# Altium PCB Mixer_Placed.PCBDOC (part 1 of 2)
Units mil, origin at the board's own origin, x right, y up, seen from the top; angles counter-clockwise.
Board outline 16350 x 11350 mil, 2 copper layers (TopLayer, BottomLayer); 554 components, 386 nets, 1551 pads, 0 vias.
Unrouted connection lines stored in the file: 1047.
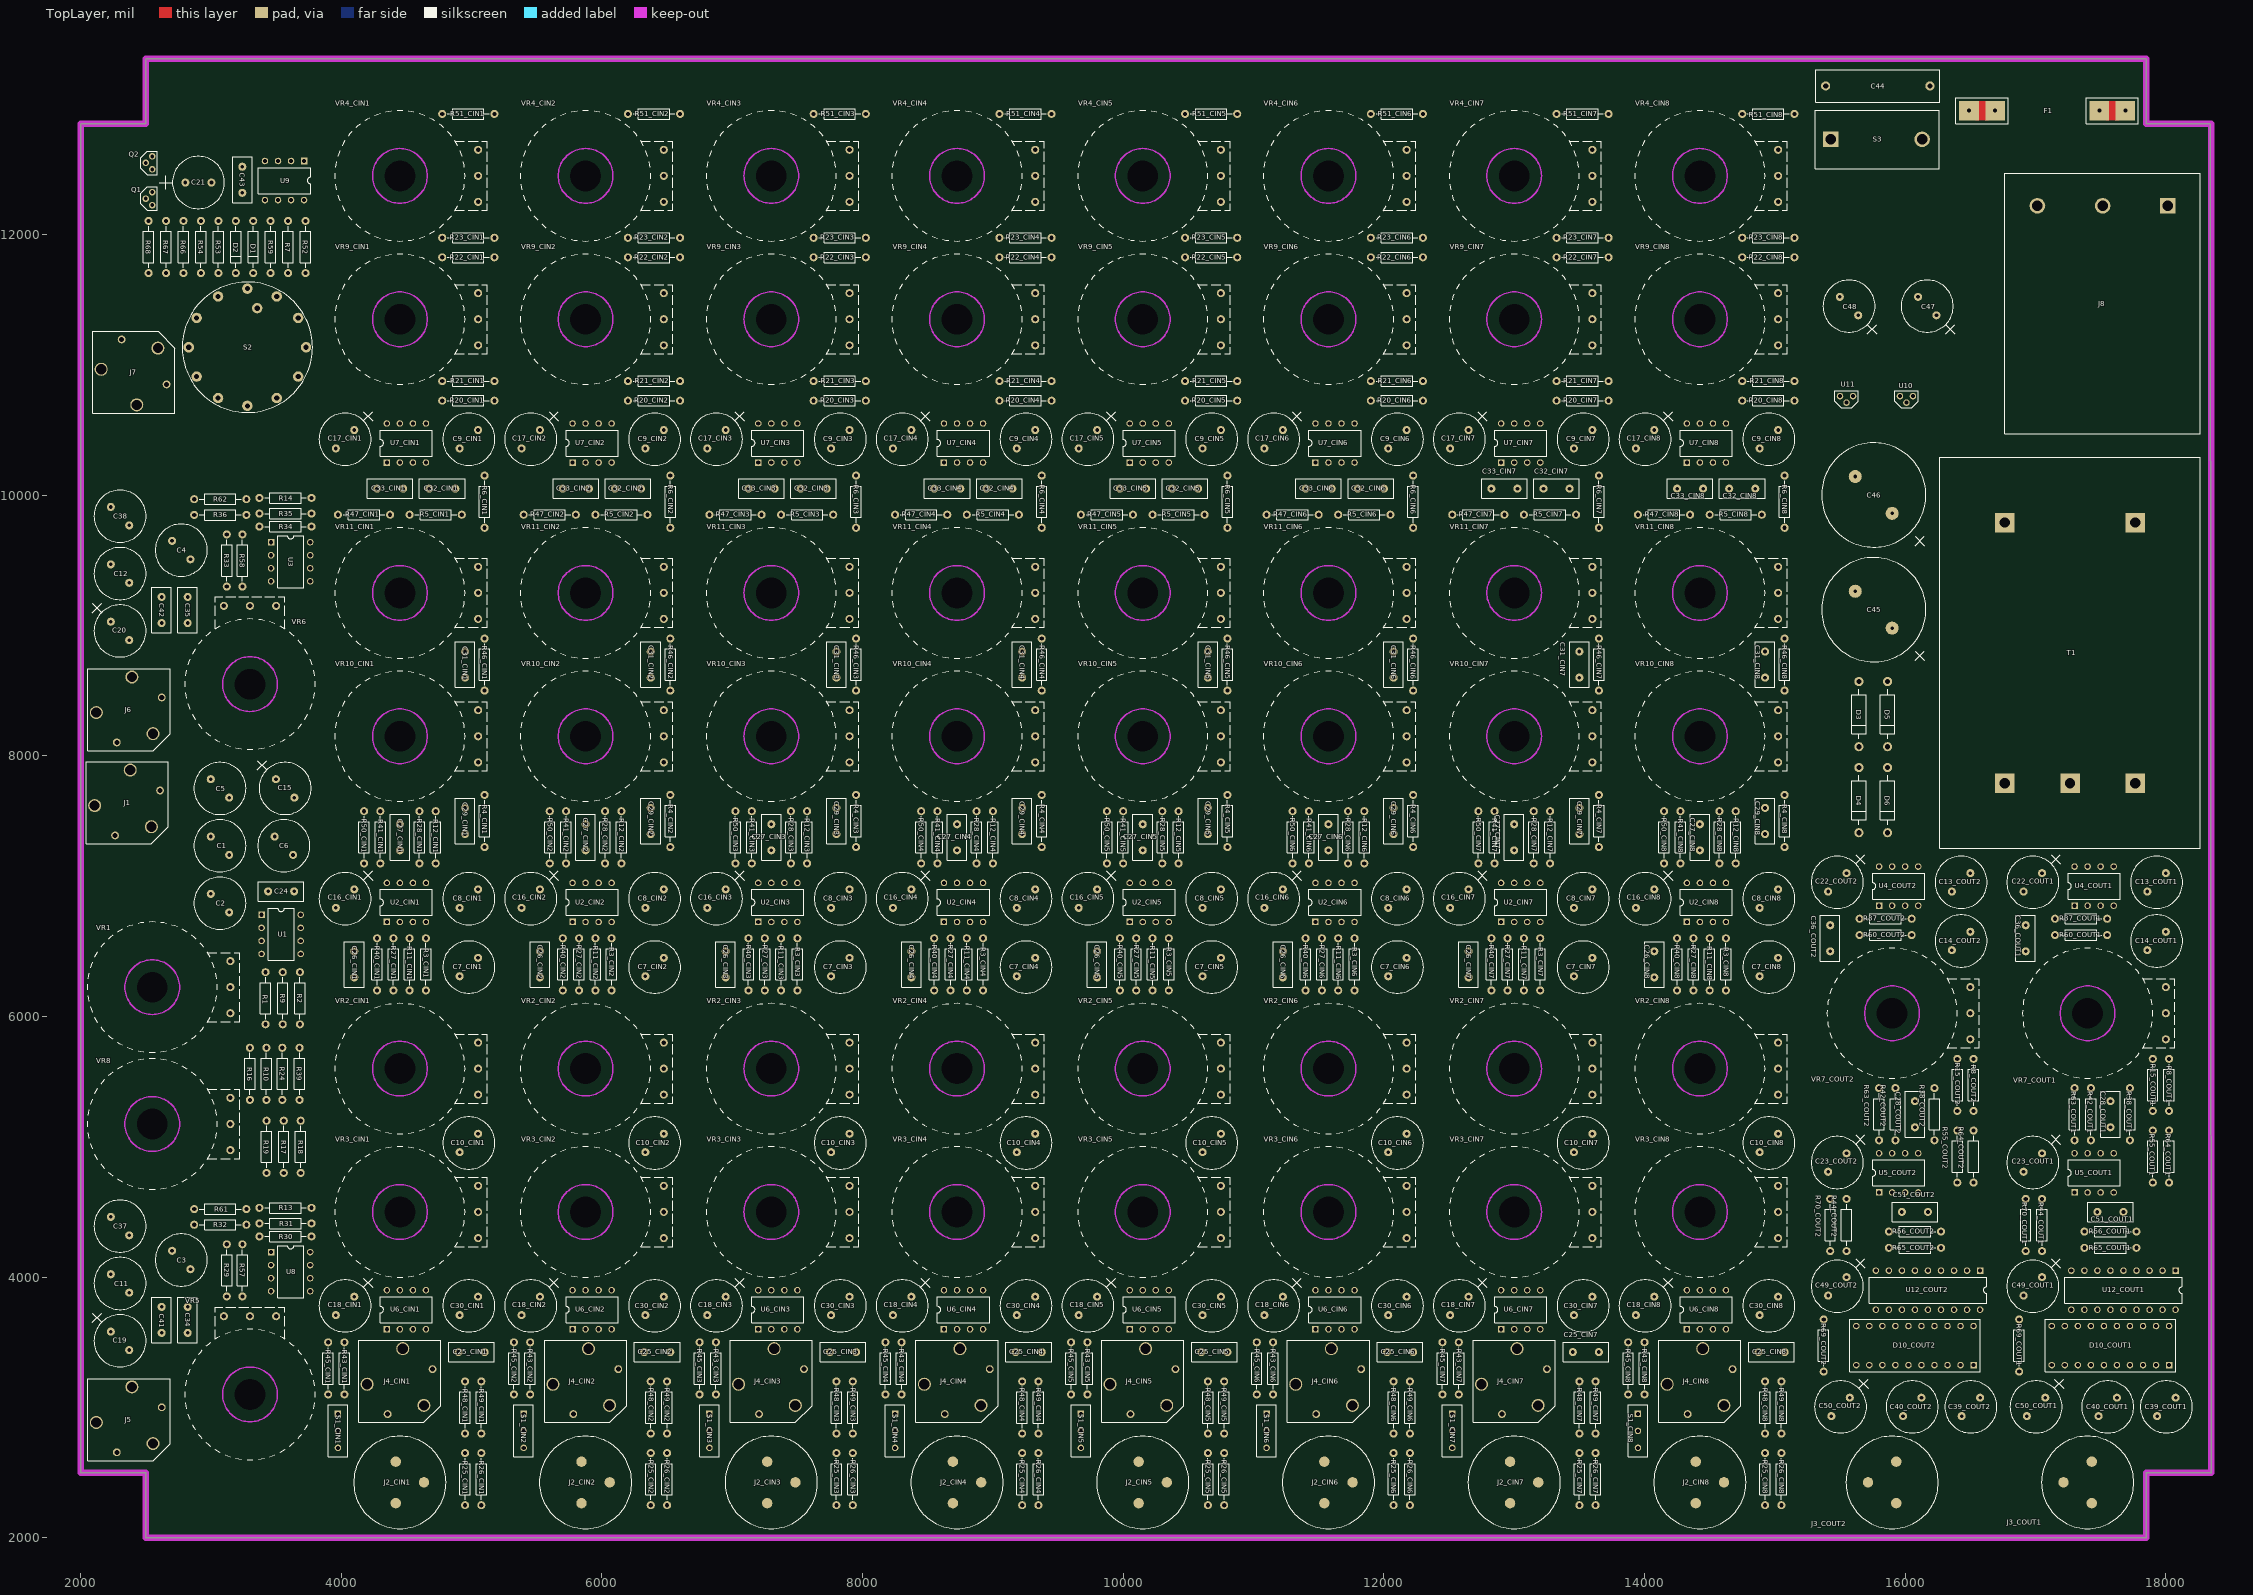
[diagram p0: TopLayer view]
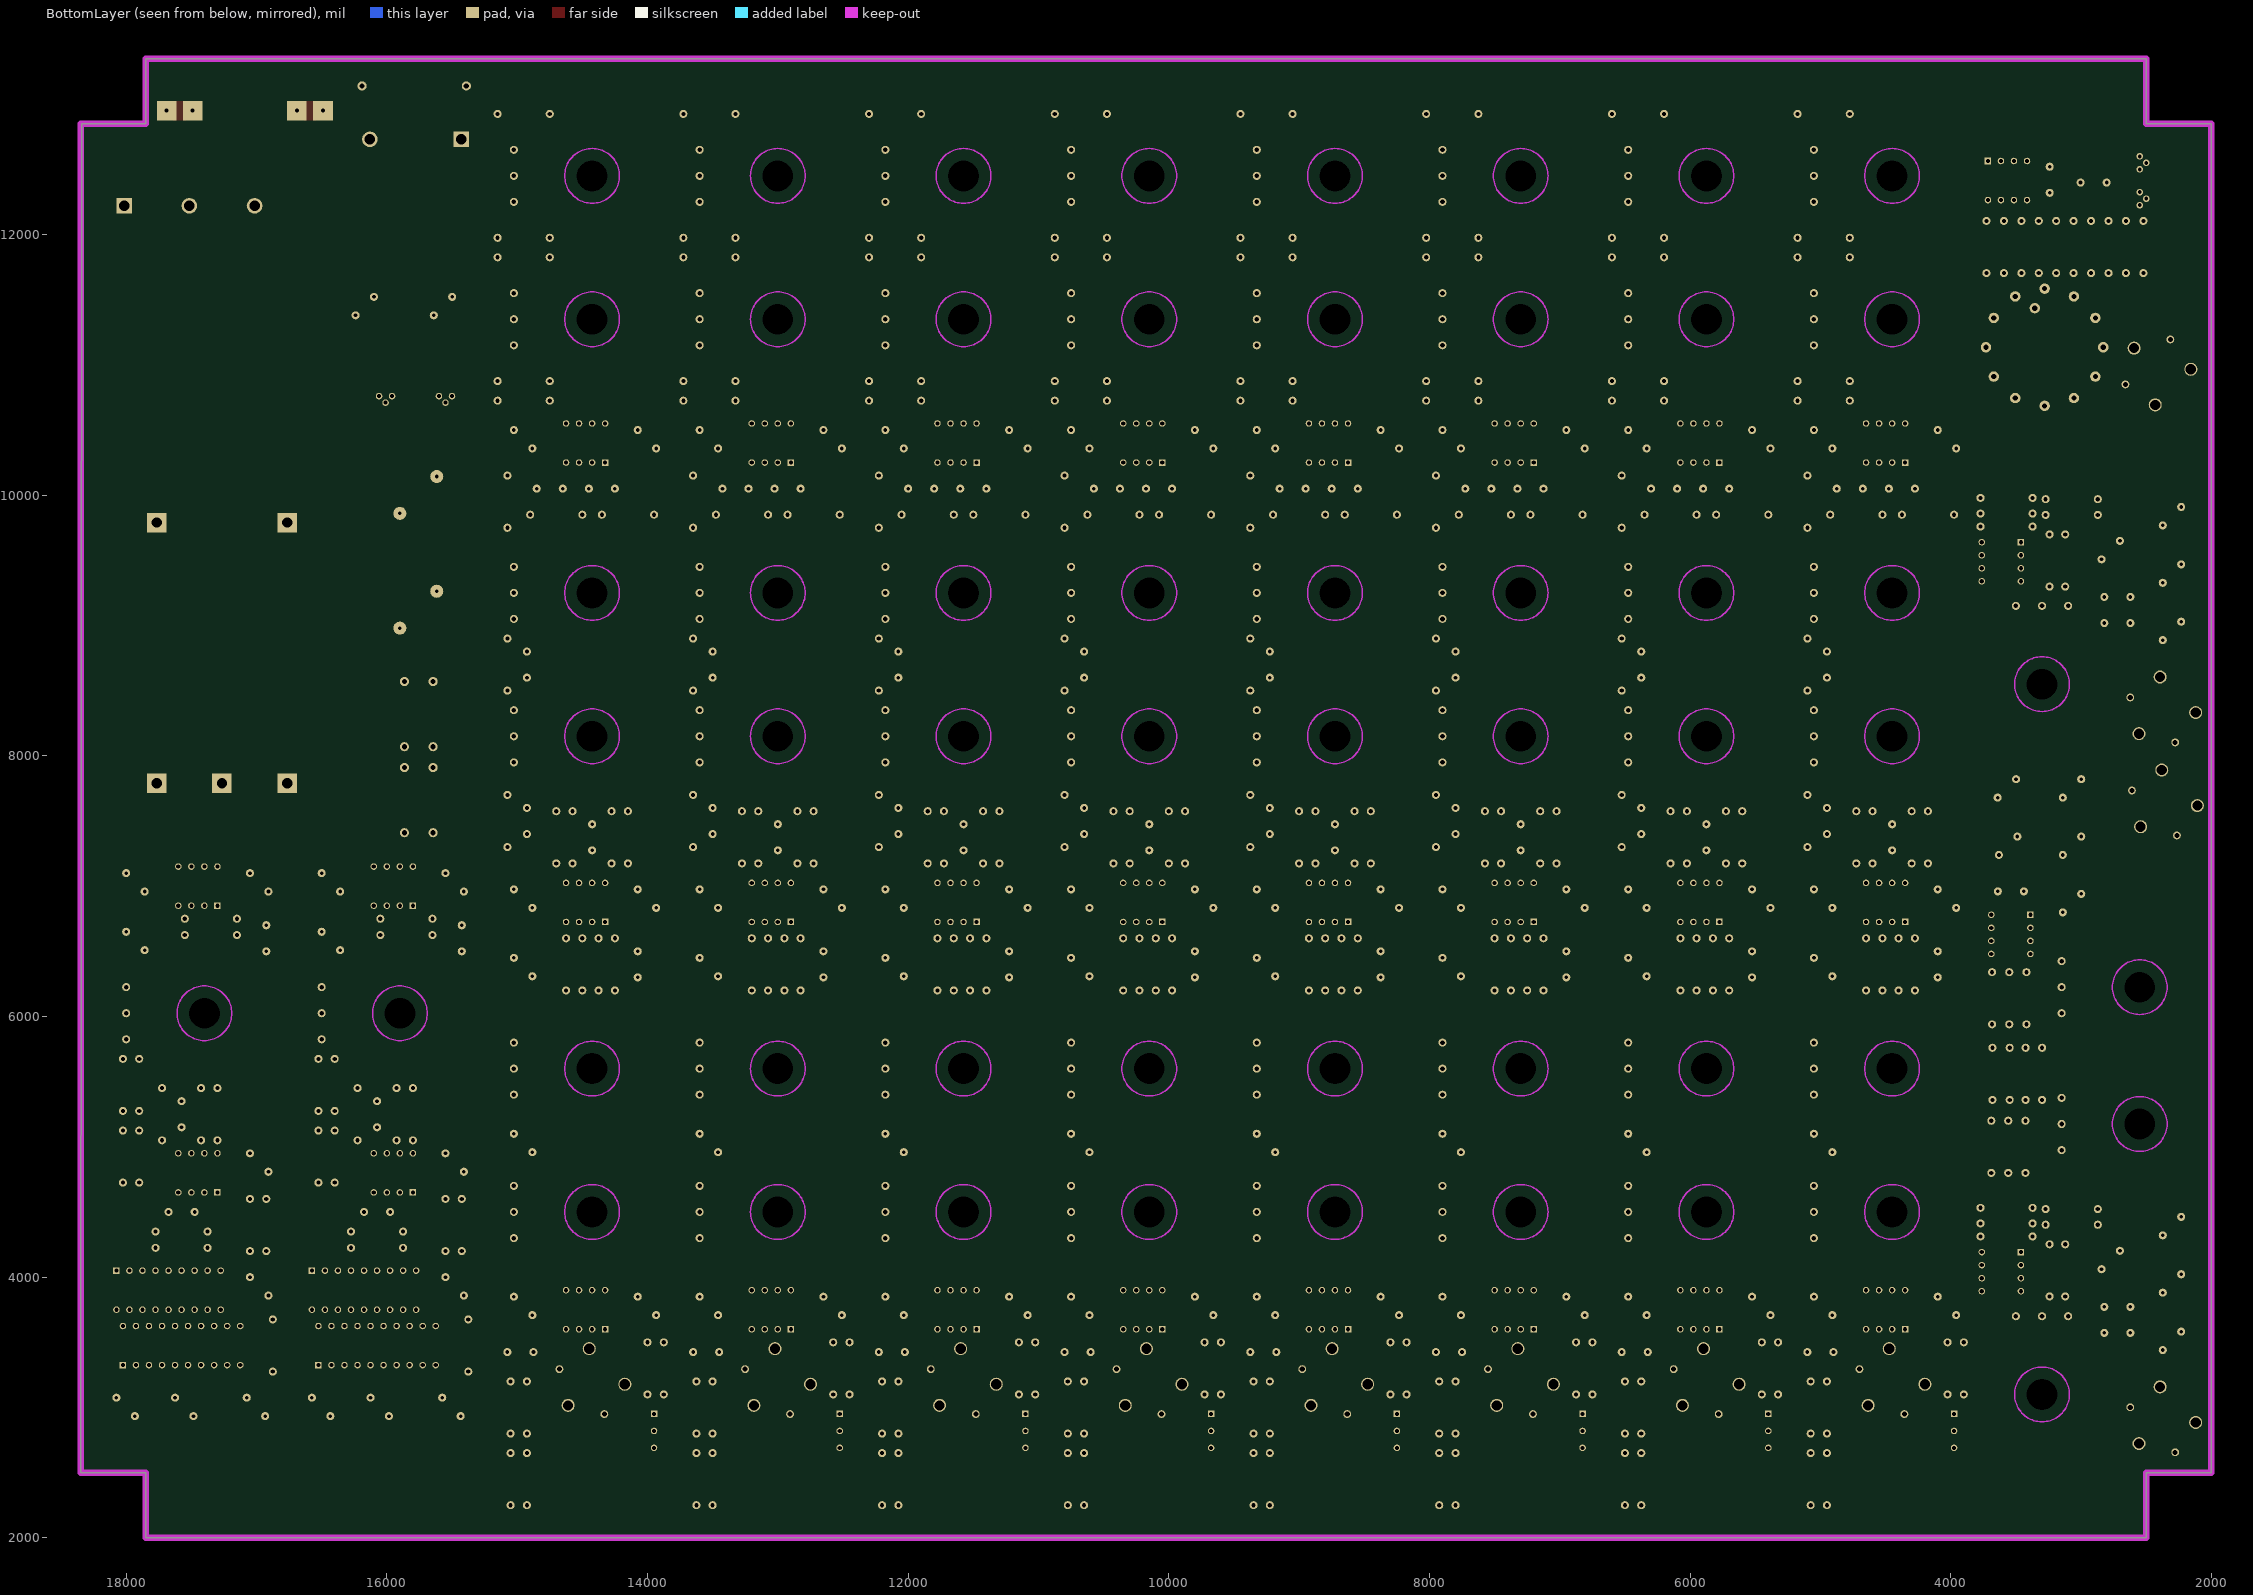
[diagram p1: BottomLayer view, seen from below]

## Layer stack, top to bottom
TopLayer: signal copper 1.4
Dielectric: core 12.6, FR-4, Dk 4.8
BottomLayer: signal copper 1.4

## Board outline
17850,2500 18350,2500 18340,12850 17850,12850 17850,13350 2500,13350 2500,12850 2000,12850 2000,2500 2500,2500 2500,2000 17850,2000 17850,2500

## Design rules (kind name [scope] priority, off if disabled: settings)
Clearance Clearance_Mains [InNetClass('Mains Voltages') vs Not OnLayer(KeepOutLayer)] p1: gap=100
Clearance [All] p2: gap=10
FabricationTestPointUsage TestPointUsage [All] p1: valid=0 allowmultiple=FALSE
FabricationTestpoint Testpoint [All] p1: side=3 testpointundercomponent=TRUE minsize=40 maxsize=100 preferedsize=60 minholesize=20 maxholesize=40 preferedholesize=32 testpointgrid=1 allowsidetop=TRUE allowsidebottom=TRUE usegrid=TRUE gridtolerance=0.01
PlaneClearance [All] p1: clearance=10
PolygonConnect [All] p1: connectstyle=Relief reliefconductorwidth=10 reliefentries=4 polygonreliefangle="90 Angle"
RoomDefinition CIN7 [InComponentClass('CIN7') vs False] p1: confinementstyle=ConfineIn formatcopy=TRUE lockcomponents=FALSE outline 12350,2050 13775,2050 13775,13300 12350,13300
RoomDefinition CIN6 [InComponentClass('CIN6') vs False] p2: confinementstyle=ConfineIn formatcopy=TRUE lockcomponents=FALSE outline 10925,2050 12350,2050 12350,13300 10925,13300
RoomDefinition CIN5 [InComponentClass('CIN5') vs False] p3: confinementstyle=ConfineIn formatcopy=TRUE lockcomponents=FALSE outline 9500,2050 10925,2050 10925,13300 9500,13300
RoomDefinition CIN4 [InComponentClass('CIN4') vs False] p4: confinementstyle=ConfineIn formatcopy=TRUE lockcomponents=FALSE outline 8075,2050 9500,2050 9500,13300 8075,13300
RoomDefinition CIN3 [InComponentClass('CIN3') vs False] p5: confinementstyle=ConfineIn formatcopy=TRUE lockcomponents=FALSE outline 6650,2050 8075,2050 8075,13300 6650,13300
RoomDefinition CIN2 [InComponentClass('CIN2') vs False] p6: confinementstyle=ConfineIn formatcopy=TRUE lockcomponents=FALSE outline 5225,2050 6650,2050 6650,13300 5225,13300
RoomDefinition CIN1 [InComponentClass('CIN1') vs False] p7: confinementstyle=ConfineIn formatcopy=TRUE lockcomponents=FALSE outline 3800,2050 5225,2050 5225,13300 3800,13300
RoomDefinition COUT2 [InComponentClass('COUT2') vs False] p8: confinementstyle=ConfineIn formatcopy=TRUE lockcomponents=FALSE outline 15250,2050 16750,2050 16750,7260 15250,7260
RoomDefinition CIN8 [InComponentClass('CIN8') vs False] p9: confinementstyle=ConfineIn formatcopy=TRUE lockcomponents=FALSE outline 13775,2050 15200,2050 15200,13300 13775,13300
RoomDefinition Auxilary [InComponentClass('Auxilary') vs False] p10: confinementstyle=ConfineIn formatcopy=TRUE lockcomponents=FALSE outline 2025,4650 3769,4650 3769,7980 2025,7980
RoomDefinition Monitor [InComponentClass('Monitor') vs False] p11: confinementstyle=ConfineIn formatcopy=TRUE lockcomponents=FALSE outline 2000,2550 3791.93,2550 3791.93,4650 2000,4650
RoomDefinition Effects [InComponentClass('Effects') vs False] p12: confinementstyle=ConfineIn formatcopy=TRUE lockcomponents=FALSE outline 2000,8025 3801.93,8025 3801.93,10419 2000,10419
RoomDefinition Headphone [InComponentClass('Headphone') vs False] p13: confinementstyle=ConfineIn formatcopy=TRUE lockcomponents=FALSE outline 2030,10595 3780,10595 3780,12745 2030,12745
RoomDefinition Power [InComponentClass('Power') vs False] p14: confinementstyle=ConfineIn formatcopy=TRUE lockcomponents=FALSE outline 15250,7260 18305,7260 18305,13280 15250,13280
RoomDefinition COUT1 [InComponentClass('COUT1') vs False] p15: confinementstyle=ConfineIn formatcopy=TRUE lockcomponents=FALSE outline 16750,2050 18250,2050 18250,7260 16750,7260
RoutingVias [All] p1: holewidth=28 width=50 viastyle="Through Hole" minholewidth=28 minwidth=50 maxholewidth=28 maxwidth=50
SilkscreenOverComponentPads [All] p1: minsilkscreentomaskgap=10
SolderMaskExpansion SolderMaskExpansion_Vias [IsVia] p1: expansion=-26
SolderMaskExpansion [All] p2: expansion=4
Width Width_Mains [InNetClass('Mains Voltages')] p1: maxlimit=100 minlimit=50 preferedwidth=100
Width [All] p2: maxlimit=20 minlimit=8 preferedwidth=20
24 further rules are at their usual default settings.

## Classes and differential pairs
net class HEADPHONE[1..8]: HEADPHONE1 HEADPHONE2 HEADPHONE3 HEADPHONE4 HEADPHONE5 HEADPHONE6 HEADPHONE7 HEADPHONE8
net class MB[1..2]: MB1 MB2
component class Auxilary: C1 C2 C5 C6 C15 C24 J1 R1 R2 R9 R10 R16 R17 R18 R19 R24 R39 U1 VR1 VR8
component class CIN1: C7_CIN1 C8_CIN1 C9_CIN1 C10_CIN1 C16_CIN1 C17_CIN1 C18_CIN1 C25_CIN1 C26_CIN1 C27_CIN1 C29_CIN1 C30_CIN1 C31_CIN1 C32_CIN1 C33_CIN1 J2_CIN1 J4_CIN1 R3_CIN1 R4_CIN1 R5_CIN1 R6_CIN1 R11_CIN1 R12_CIN1 R20_CIN1 R21_CIN1 R22_CIN1 R23_CIN1 R25_CIN1 R26_CIN1 R27_CIN1 R28_CIN1 R40_CIN1 R41_CIN1 R43_CIN1 R45_CIN1 R46_CIN1 R47_CIN1 R48_CIN1 R49_CIN1 R50_CIN1 R51_CIN1 S1_CIN1 U2_CIN1 U6_CIN1 U7_CIN1 VR2_CIN1 VR3_CIN1 VR4_CIN1 VR9_CIN1 VR10_CIN1 VR11_CIN1
component class CIN2: C7_CIN2 C8_CIN2 C9_CIN2 C10_CIN2 C16_CIN2 C17_CIN2 C18_CIN2 C25_CIN2 C26_CIN2 C27_CIN2 C29_CIN2 C30_CIN2 C31_CIN2 C32_CIN2 C33_CIN2 J2_CIN2 J4_CIN2 R3_CIN2 R4_CIN2 R5_CIN2 R6_CIN2 R11_CIN2 R12_CIN2 R20_CIN2 R21_CIN2 R22_CIN2 R23_CIN2 R25_CIN2 R26_CIN2 R27_CIN2 R28_CIN2 R40_CIN2 R41_CIN2 R43_CIN2 R45_CIN2 R46_CIN2 R47_CIN2 R48_CIN2 R49_CIN2 R50_CIN2 R51_CIN2 S1_CIN2 U2_CIN2 U6_CIN2 U7_CIN2 VR2_CIN2 VR3_CIN2 VR4_CIN2 VR9_CIN2 VR10_CIN2 VR11_CIN2
component class CIN3: C7_CIN3 C8_CIN3 C9_CIN3 C10_CIN3 C16_CIN3 C17_CIN3 C18_CIN3 C25_CIN3 C26_CIN3 C27_CIN3 C29_CIN3 C30_CIN3 C31_CIN3 C32_CIN3 C33_CIN3 J2_CIN3 J4_CIN3 R3_CIN3 R4_CIN3 R5_CIN3 R6_CIN3 R11_CIN3 R12_CIN3 R20_CIN3 R21_CIN3 R22_CIN3 R23_CIN3 R25_CIN3 R26_CIN3 R27_CIN3 R28_CIN3 R40_CIN3 R41_CIN3 R43_CIN3 R45_CIN3 R46_CIN3 R47_CIN3 R48_CIN3 R49_CIN3 R50_CIN3 R51_CIN3 S1_CIN3 U2_CIN3 U6_CIN3 U7_CIN3 VR2_CIN3 VR3_CIN3 VR4_CIN3 VR9_CIN3 VR10_CIN3 VR11_CIN3
component class CIN4: C7_CIN4 C8_CIN4 C9_CIN4 C10_CIN4 C16_CIN4 C17_CIN4 C18_CIN4 C25_CIN4 C26_CIN4 C27_CIN4 C29_CIN4 C30_CIN4 C31_CIN4 C32_CIN4 C33_CIN4 J2_CIN4 J4_CIN4 R3_CIN4 R4_CIN4 R5_CIN4 R6_CIN4 R11_CIN4 R12_CIN4 R20_CIN4 R21_CIN4 R22_CIN4 R23_CIN4 R25_CIN4 R26_CIN4 R27_CIN4 R28_CIN4 R40_CIN4 R41_CIN4 R43_CIN4 R45_CIN4 R46_CIN4 R47_CIN4 R48_CIN4 R49_CIN4 R50_CIN4 R51_CIN4 S1_CIN4 U2_CIN4 U6_CIN4 U7_CIN4 VR2_CIN4 VR3_CIN4 VR4_CIN4 VR9_CIN4 VR10_CIN4 VR11_CIN4
component class CIN5: C7_CIN5 C8_CIN5 C9_CIN5 C10_CIN5 C16_CIN5 C17_CIN5 C18_CIN5 C25_CIN5 C26_CIN5 C27_CIN5 C29_CIN5 C30_CIN5 C31_CIN5 C32_CIN5 C33_CIN5 J2_CIN5 J4_CIN5 R3_CIN5 R4_CIN5 R5_CIN5 R6_CIN5 R11_CIN5 R12_CIN5 R20_CIN5 R21_CIN5 R22_CIN5 R23_CIN5 R25_CIN5 R26_CIN5 R27_CIN5 R28_CIN5 R40_CIN5 R41_CIN5 R43_CIN5 R45_CIN5 R46_CIN5 R47_CIN5 R48_CIN5 R49_CIN5 R50_CIN5 R51_CIN5 S1_CIN5 U2_CIN5 U6_CIN5 U7_CIN5 VR2_CIN5 VR3_CIN5 VR4_CIN5 VR9_CIN5 VR10_CIN5 VR11_CIN5
component class CIN6: C7_CIN6 C8_CIN6 C9_CIN6 C10_CIN6 C16_CIN6 C17_CIN6 C18_CIN6 C25_CIN6 C26_CIN6 C27_CIN6 C29_CIN6 C30_CIN6 C31_CIN6 C32_CIN6 C33_CIN6 J2_CIN6 J4_CIN6 R3_CIN6 R4_CIN6 R5_CIN6 R6_CIN6 R11_CIN6 R12_CIN6 R20_CIN6 R21_CIN6 R22_CIN6 R23_CIN6 R25_CIN6 R26_CIN6 R27_CIN6 R28_CIN6 R40_CIN6 R41_CIN6 R43_CIN6 R45_CIN6 R46_CIN6 R47_CIN6 R48_CIN6 R49_CIN6 R50_CIN6 R51_CIN6 S1_CIN6 U2_CIN6 U6_CIN6 U7_CIN6 VR2_CIN6 VR3_CIN6 VR4_CIN6 VR9_CIN6 VR10_CIN6 VR11_CIN6
component class CIN7: C7_CIN7 C8_CIN7 C9_CIN7 C10_CIN7 C16_CIN7 C17_CIN7 C18_CIN7 C25_CIN7 C26_CIN7 C27_CIN7 C29_CIN7 C30_CIN7 C31_CIN7 C32_CIN7 C33_CIN7 J2_CIN7 J4_CIN7 R3_CIN7 R4_CIN7 R5_CIN7 R6_CIN7 R11_CIN7 R12_CIN7 R20_CIN7 R21_CIN7 R22_CIN7 R23_CIN7 R25_CIN7 R26_CIN7 R27_CIN7 R28_CIN7 R40_CIN7 R41_CIN7 R43_CIN7 R45_CIN7 R46_CIN7 R47_CIN7 R48_CIN7 R49_CIN7 R50_CIN7 R51_CIN7 S1_CIN7 U2_CIN7 U6_CIN7 U7_CIN7 VR2_CIN7 VR3_CIN7 VR4_CIN7 VR9_CIN7 VR10_CIN7 VR11_CIN7
component class CIN8: C7_CIN8 C8_CIN8 C9_CIN8 C10_CIN8 C16_CIN8 C17_CIN8 C18_CIN8 C25_CIN8 C26_CIN8 C27_CIN8 C29_CIN8 C30_CIN8 C31_CIN8 C32_CIN8 C33_CIN8 J2_CIN8 J4_CIN8 R3_CIN8 R4_CIN8 R5_CIN8 R6_CIN8 R11_CIN8 R12_CIN8 R20_CIN8 R21_CIN8 R22_CIN8 R23_CIN8 R25_CIN8 R26_CIN8 R27_CIN8 R28_CIN8 R40_CIN8 R41_CIN8 R43_CIN8 R45_CIN8 R46_CIN8 R47_CIN8 R48_CIN8 R49_CIN8 R50_CIN8 R51_CIN8 S1_CIN8 U2_CIN8 U6_CIN8 U7_CIN8 VR2_CIN8 VR3_CIN8 VR4_CIN8 VR9_CIN8 VR10_CIN8 VR11_CIN8
component class COUT1: C13_COUT1 C14_COUT1 C22_COUT1 C23_COUT1 C28_COUT1 C36_COUT1 C39_COUT1 C40_COUT1 C49_COUT1 C50_COUT1 C51_COUT1 D10_COUT1 J3_COUT1 R8_COUT1 R15_COUT1 R37_COUT1 R38_COUT1 R42_COUT1 R44_COUT1 R55_COUT1 R56_COUT1 R60_COUT1 R63_COUT1 R64_COUT1 R65_COUT1 R69_COUT1 R70_COUT1 U4_COUT1 U5_COUT1 U12_COUT1 VR7_COUT1
component class COUT2: C13_COUT2 C14_COUT2 C22_COUT2 C23_COUT2 C28_COUT2 C36_COUT2 C39_COUT2 C40_COUT2 C49_COUT2 C50_COUT2 C51_COUT2 D10_COUT2 J3_COUT2 R8_COUT2 R15_COUT2 R37_COUT2 R38_COUT2 R42_COUT2 R44_COUT2 R55_COUT2 R56_COUT2 R60_COUT2 R63_COUT2 R64_COUT2 R65_COUT2 R69_COUT2 R70_COUT2 U4_COUT2 U5_COUT2 U12_COUT2 VR7_COUT2
component class Effects: C4 C12 C20 C35 C38 C42 J6 R14 R33 R34 R35 R36 R58 R62 U3 VR6
component class Headphone: C21 C43 D1 D2 J7 Q1 Q2 R7 R52 R53 R54 R59 R66 R67 R68 S2 U9
component class Monitor: C3 C11 C19 C34 C37 C41 J5 R13 R29 R30 R31 R32 R57 R61 U8 VR5
component class Power: C44 C45 C46 C47 C48 D3 D4 D5 D6 F1 J8 S3 T1 U10 U11
channel class "Input channel": CIN1 CIN2 CIN3 CIN4 CIN5 CIN6 CIN7 CIN8
channel class "Output channel": COUT1 COUT2
net class "Mains Voltages": A_FUSE A_IN A_SWITCH NEUTRAL

## Components (designator, comment, footprint, x,y, rotation, side; value= is the part's Value field where it differs from the comment)
C1 "1uF" RB.2/.4-NP 2999,7380.53 r135 top
C2 "1uF" RB.2/.4-NP 2999,6940.4 r135 top
C3 "1uF" RB.2/.4-NP 2701.93,4202.15 r135 top
C4 "1uF" RB.2/.4-NP 2701.93,9649.13 r135 top
C5 "2.2uF" RB.2/.4-NP 2999,7820.66 r135 top
C6 "2.2uF" RB.2/.4-NP 3489,7380.53 r135 top
C7_CIN1 "2.2uF" RB.2/.4-NP 5050,6450 r45 top (schematic designator C7)
C7_CIN2 "2.2uF" RB.2/.4-NP 6475,6450 r45 top (schematic designator C7)
C7_CIN3 "2.2uF" RB.2/.4-NP 7900,6450 r45 top (schematic designator C7)
C7_CIN4 "2.2uF" RB.2/.4-NP 9325,6450 r45 top (schematic designator C7)
C7_CIN5 "2.2uF" RB.2/.4-NP 10750,6450 r45 top (schematic designator C7)
C7_CIN6 "2.2uF" RB.2/.4-NP 12175,6450 r45 top (schematic designator C7)
C7_CIN7 "2.2uF" RB.2/.4-NP 13600,6450 r45 top (schematic designator C7)
C7_CIN8 "2.2uF" RB.2/.4-NP 15025,6450 r45 top (schematic designator C7)
C8_CIN1 "2.2uF" RB.2/.4-NP 5050,6975 r45 top (schematic designator C8)
C8_CIN2 "2.2uF" RB.2/.4-NP 6475,6975 r45 top (schematic designator C8)
C8_CIN3 "2.2uF" RB.2/.4-NP 7900,6975 r45 top (schematic designator C8)
C8_CIN4 "2.2uF" RB.2/.4-NP 9325,6975 r45 top (schematic designator C8)
C8_CIN5 "2.2uF" RB.2/.4-NP 10750,6975 r45 top (schematic designator C8)
C8_CIN6 "2.2uF" RB.2/.4-NP 12175,6975 r45 top (schematic designator C8)
C8_CIN7 "2.2uF" RB.2/.4-NP 13600,6975 r45 top (schematic designator C8)
C8_CIN8 "2.2uF" RB.2/.4-NP 15025,6975 r45 top (schematic designator C8)
C9_CIN1 "2.2uF" RB.2/.4-NP 5050,10500 r45 top (schematic designator C9)
C9_CIN2 "2.2uF" RB.2/.4-NP 6475,10500 r45 top (schematic designator C9)
C9_CIN3 "2.2uF" RB.2/.4-NP 7900,10500 r45 top (schematic designator C9)
C9_CIN4 "2.2uF" RB.2/.4-NP 9325,10500 r45 top (schematic designator C9)
C9_CIN5 "2.2uF" RB.2/.4-NP 10750,10500 r45 top (schematic designator C9)
C9_CIN6 "2.2uF" RB.2/.4-NP 12175,10500 r45 top (schematic designator C9)
C9_CIN7 "2.2uF" RB.2/.4-NP 13600,10500 r45 top (schematic designator C9)
C9_CIN8 "2.2uF" RB.2/.4-NP 15025,10500 r45 top (schematic designator C9)
C10_CIN1 "2.2uF" RB.2/.4-NP 5050,5100 r45 top (schematic designator C10)
C10_CIN2 "2.2uF" RB.2/.4-NP 6475,5100 r45 top (schematic designator C10)
C10_CIN3 "2.2uF" RB.2/.4-NP 7900,5100 r45 top (schematic designator C10)
C10_CIN4 "2.2uF" RB.2/.4-NP 9325,5100 r45 top (schematic designator C10)
C10_CIN5 "2.2uF" RB.2/.4-NP 10750,5100 r45 top (schematic designator C10)
C10_CIN6 "2.2uF" RB.2/.4-NP 12175,5100 r45 top (schematic designator C10)
C10_CIN7 "2.2uF" RB.2/.4-NP 13600,5100 r45 top (schematic designator C10)
C10_CIN8 "2.2uF" RB.2/.4-NP 15025,5100 r45 top (schematic designator C10)
C11 "2.2uF" RB.2/.4-NP 2231.93,4022.15 r135 top
C12 "2.2uF" RB.2/.4-NP 2231.93,9469.13 r135 top
C13_COUT1 "2.2uF" RB.2/.4-NP 18000,7100 r45 top (schematic designator C13)
C13_COUT2 "2.2uF" RB.2/.4-NP 16500,7100 r45 top (schematic designator C13)
C14_COUT1 "2.2uF" RB.2/.4-NP 18000,6650 r45 top (schematic designator C14)
C14_COUT2 "2.2uF" RB.2/.4-NP 16500,6650 r45 top (schematic designator C14)
C15 "10uF" RB.2/.4 3499,7820.66 r135 top
C16_CIN1 "10uF" RB.2/.4 4100,6975 r45 top (schematic designator C16)
C16_CIN2 "10uF" RB.2/.4 5525,6975 r45 top (schematic designator C16)
C16_CIN3 "10uF" RB.2/.4 6950,6975 r45 top (schematic designator C16)
C16_CIN4 "10uF" RB.2/.4 8375,6975 r45 top (schematic designator C16)
C16_CIN5 "10uF" RB.2/.4 9800,6975 r45 top (schematic designator C16)
C16_CIN6 "10uF" RB.2/.4 11225,6975 r45 top (schematic designator C16)
C16_CIN7 "10uF" RB.2/.4 12650,6975 r45 top (schematic designator C16)
C16_CIN8 "10uF" RB.2/.4 14075,6975 r45 top (schematic designator C16)
C17_CIN1 "10uF" RB.2/.4 4100,10500 r45 top (schematic designator C17)
C17_CIN2 "10uF" RB.2/.4 5525,10500 r45 top (schematic designator C17)
C17_CIN3 "10uF" RB.2/.4 6950,10500 r45 top (schematic designator C17)
C17_CIN4 "10uF" RB.2/.4 8375,10500 r45 top (schematic designator C17)
C17_CIN5 "10uF" RB.2/.4 9800,10500 r45 top (schematic designator C17)
C17_CIN6 "10uF" RB.2/.4 11225,10500 r45 top (schematic designator C17)
C17_CIN7 "10uF" RB.2/.4 12650,10500 r45 top (schematic designator C17)
C17_CIN8 "10uF" RB.2/.4 14075,10500 r45 top (schematic designator C17)
C18_CIN1 "10uF" RB.2/.4 4100,3850 r45 top (schematic designator C18)
C18_CIN2 "10uF" RB.2/.4 5525,3850 r45 top (schematic designator C18)
C18_CIN3 "10uF" RB.2/.4 6950,3850 r45 top (schematic designator C18)
C18_CIN4 "10uF" RB.2/.4 8375,3850 r45 top (schematic designator C18)
C18_CIN5 "10uF" RB.2/.4 9800,3850 r45 top (schematic designator C18)
C18_CIN6 "10uF" RB.2/.4 11225,3850 r45 top (schematic designator C18)
C18_CIN7 "10uF" RB.2/.4 12650,3850 r45 top (schematic designator C18)
C18_CIN8 "10uF" RB.2/.4 14075,3850 r45 top (schematic designator C18)
C19 "10uF" RB.2/.4 2231.93,3582.02 r135 top
C20 "10uF" RB.2/.4 2231.93,9029 r135 top
C21 "10uF" RB.2/.4 2804.06,12399 r180 top
C22_COUT1 "10uF" RB.2/.4 17050,7100 r45 top (schematic designator C22)
C22_COUT2 "10uF" RB.2/.4 15550,7100 r45 top (schematic designator C22)
C23_COUT1 "10uF" RB.2/.4 17050,4950 r45 top (schematic designator C23)
C23_COUT2 "10uF" RB.2/.4 15550,4950 r45 top (schematic designator C23)
C24 "270pF" RAD0.2 3639,6960 r180 top
C25_CIN1 "270pF" RAD0.2 4900,3425 r0 top (schematic designator C25)
C25_CIN2 "270pF" RAD0.2 6325,3425 r0 top (schematic designator C25)
C25_CIN3 "270pF" RAD0.2 7750,3425 r0 top (schematic designator C25)
C25_CIN4 "270pF" RAD0.2 9175,3425 r0 top (schematic designator C25)
C25_CIN5 "270pF" RAD0.2 10600,3425 r0 top (schematic designator C25)
C25_CIN6 "270pF" RAD0.2 12025,3425 r0 top (schematic designator C25)
C25_CIN7 "270pF" RAD0.2 13450,3425 r0 top (schematic designator C25)
C25_CIN8 "270pF" RAD0.2 14875,3425 r0 top (schematic designator C25)
C26_CIN1 "270pF" RAD0.2 4100,6300 r90 top (schematic designator C26)
C26_CIN2 "270pF" RAD0.2 5525,6300 r90 top (schematic designator C26)
C26_CIN3 "270pF" RAD0.2 6950,6300 r90 top (schematic designator C26)
C26_CIN4 "270pF" RAD0.2 8375,6300 r90 top (schematic designator C26)
C26_CIN5 "270pF" RAD0.2 9800,6300 r90 top (schematic designator C26)
C26_CIN6 "270pF" RAD0.2 11225,6300 r90 top (schematic designator C26)
C26_CIN7 "270pF" RAD0.2 12650,6300 r90 top (schematic designator C26)
C26_CIN8 "270pF" RAD0.2 14075,6300 r90 top (schematic designator C26)
C27_CIN1 "270pF" RAD0.2 4450,7475 r270 top (schematic designator C27)
C27_CIN2 "270pF" RAD0.2 5875,7475 r270 top (schematic designator C27)
C27_CIN3 "270pF" RAD0.2 7300,7475 r270 top (schematic designator C27)
C27_CIN4 "270pF" RAD0.2 8725,7475 r270 top (schematic designator C27)
C27_CIN5 "270pF" RAD0.2 10150,7475 r270 top (schematic designator C27)
C27_CIN6 "270pF" RAD0.2 11575,7475 r270 top (schematic designator C27)
C27_CIN7 "270pF" RAD0.2 13000,7475 r270 top (schematic designator C27)
C27_CIN8 "270pF" RAD0.2 14425,7475 r270 top (schematic designator C27)
C28_COUT1 "270pF" RAD0.2 17575,5350 r270 top (schematic designator C28)
C28_COUT2 "270pF" RAD0.2 16075,5350 r270 top (schematic designator C28)
C29_CIN1 "100nF" RAD0.2 4950,7400 r90 top (schematic designator C29)
C29_CIN2 "100nF" RAD0.2 6375,7400 r90 top (schematic designator C29)
C29_CIN3 "100nF" RAD0.2 7800,7400 r90 top (schematic designator C29)
C29_CIN4 "100nF" RAD0.2 9225,7400 r90 top (schematic designator C29)
C29_CIN5 "100nF" RAD0.2 10650,7400 r90 top (schematic designator C29)
C29_CIN6 "100nF" RAD0.2 12075,7400 r90 top (schematic designator C29)
C29_CIN7 "100nF" RAD0.2 13500,7400 r90 top (schematic designator C29)
C29_CIN8 "100nF" RAD0.2 14925,7400 r90 top (schematic designator C29)
C30_CIN1 "6.8uF" RB.2/.4-NP 5050,3850 r45 top (schematic designator C30)
C30_CIN2 "6.8uF" RB.2/.4-NP 6475,3850 r45 top (schematic designator C30)
C30_CIN3 "6.8uF" RB.2/.4-NP 7900,3850 r45 top (schematic designator C30)
C30_CIN4 "6.8uF" RB.2/.4-NP 9325,3850 r45 top (schematic designator C30)
C30_CIN5 "6.8uF" RB.2/.4-NP 10750,3850 r45 top (schematic designator C30)
C30_CIN6 "6.8uF" RB.2/.4-NP 12175,3850 r45 top (schematic designator C30)
C30_CIN7 "6.8uF" RB.2/.4-NP 13600,3850 r45 top (schematic designator C30)
C30_CIN8 "6.8uF" RB.2/.4-NP 15025,3850 r45 top (schematic designator C30)
C31_CIN1 "4.7nF" RAD0.2 4950,8600 r90 top (schematic designator C31)
C31_CIN2 "4.7nF" RAD0.2 6375,8600 r90 top (schematic designator C31)
C31_CIN3 "4.7nF" RAD0.2 7800,8600 r90 top (schematic designator C31)
C31_CIN4 "4.7nF" RAD0.2 9225,8600 r90 top (schematic designator C31)
C31_CIN5 "4.7nF" RAD0.2 10650,8600 r90 top (schematic designator C31)
C31_CIN6 "4.7nF" RAD0.2 12075,8600 r90 top (schematic designator C31)
C31_CIN7 "4.7nF" RAD0.2 13500,8600 r90 top (schematic designator C31)
C31_CIN8 "4.7nF" RAD0.2 14925,8600 r90 top (schematic designator C31)
C32_CIN1 "4.7nF" RAD0.2 4875,10050 r180 top (schematic designator C32)
C32_CIN2 "4.7nF" RAD0.2 6300,10050 r180 top (schematic designator C32)
C32_CIN3 "4.7nF" RAD0.2 7725,10050 r180 top (schematic designator C32)
C32_CIN4 "4.7nF" RAD0.2 9150,10050 r180 top (schematic designator C32)
C32_CIN5 "4.7nF" RAD0.2 10575,10050 r180 top (schematic designator C32)
C32_CIN6 "4.7nF" RAD0.2 12000,10050 r180 top (schematic designator C32)
C32_CIN7 "4.7nF" RAD0.2 13425,10050 r180 top (schematic designator C32)
C32_CIN8 "4.7nF" RAD0.2 14850,10050 r180 top (schematic designator C32)
C33_CIN1 "10pF" RAD0.2 4275,10050 r0 top (schematic designator C33)
C33_CIN2 "10pF" RAD0.2 5700,10050 r0 top (schematic designator C33)
C33_CIN3 "10pF" RAD0.2 7125,10050 r0 top (schematic designator C33)
C33_CIN4 "10pF" RAD0.2 8550,10050 r0 top (schematic designator C33)
C33_CIN5 "10pF" RAD0.2 9975,10050 r0 top (schematic designator C33)
C33_CIN6 "10pF" RAD0.2 11400,10050 r0 top (schematic designator C33)
C33_CIN7 "10pF" RAD0.2 12825,10050 r0 top (schematic designator C33)
C33_CIN8 "10pF" RAD0.2 14250,10050 r0 top (schematic designator C33)
C34 "27pF" RAD0.2 2821.93,3772.02 r270 top
C35 "27pF" RAD0.2 2821.93,9219 r270 top
C36_COUT1 "27pF" RAD0.2 16925,6500 r90 top (schematic designator C36)
C36_COUT2 "27pF" RAD0.2 15425,6500 r90 top (schematic designator C36)
C37 "47uF" RB.2/.4-NP 2231.93,4462.28 r135 top
C38 "47uF" RB.2/.4-NP 2231.93,9909.26 r135 top
C39_COUT1 "47uF" RB.2/.4-NP 18075,3075 r45 top (schematic designator C39)
C39_COUT2 "47uF" RB.2/.4-NP 16575,3075 r45 top (schematic designator C39)
C40_COUT1 "47uF" RB.2/.4-NP 17625,3075 r45 top (schematic designator C40)
C40_COUT2 "47uF" RB.2/.4-NP 16125,3075 r45 top (schematic designator C40)
C41 "1nF" RAD0.2 2621.93,3772.02 r270 top
C42 "1nF" RAD0.2 2621.93,9219 r270 top
C43 "22pF" RAD0.2 3241,12520.04 r270 top
C44 "1nF / 2kV" RAD0.8 15390,13140 r0 top
C45 "1000uF" RB.4/.8 15900,8980 r315 top
C46 "1000uF" RB.4/.8 15900,9860 r315 top
C47 "10uF" RB.2/.4 16240,11380 r315 top
C48 "10uF" RB.2/.4 15640,11380 r315 top
C49_COUT1 "10uF" RB.2/.4 17050,4000 r45 top (schematic designator C49)
C49_COUT2 "10uF" RB.2/.4 15550,4000 r45 top (schematic designator C49)
C50_COUT1 "100uF" RB.2/.4 17075,3075 r45 top (schematic designator C50)
C50_COUT2 "100uF" RB.2/.4 15575,3075 r45 top (schematic designator C50)
C51_COUT1 "180pF" RAD0.2 17475,4500 r0 top (schematic designator C51)
C51_COUT2 "180pF" RAD0.2 15975,4500 r0 top (schematic designator C51)
D1 "1N914" DIODE0.4 3324.76,12104.02 r270 top
D2 "1N914" DIODE0.4 3191,12104.02 r270 top
D3 "1N4004" DIODE0.5 15645,8570 r270 top
D4 "1N4004" DIODE0.5 15645,7910 r270 top
D5 "1N4004" DIODE0.5 15865,8570 r270 top
D6 "1N4004" DIODE0.5 15865,7910 r270 top
D10_COUT1 "LED-10 BAR" "LED - 10 BAR HORIZONTAL" 18025,3325 r90 top (schematic designator D10)
D10_COUT2 "LED-10 BAR" "LED - 10 BAR HORIZONTAL" 16525,3325 r90 top (schematic designator D10)
F1 "1A" FUSE 17690,12950 r180 top
J1 "Auxilary In" JACK-6.25MM 2359,7640 r90 top
J2_CIN1 "XLR" XLR-FEMALE 4450,2425 r90 top (schematic designator J2)
J2_CIN2 "XLR" XLR-FEMALE 5875,2425 r90 top (schematic designator J2)
J2_CIN3 "XLR" XLR-FEMALE 7300,2425 r90 top (schematic designator J2)
J2_CIN4 "XLR" XLR-FEMALE 8725,2425 r90 top (schematic designator J2)
J2_CIN5 "XLR" XLR-FEMALE 10150,2425 r90 top (schematic designator J2)
J2_CIN6 "XLR" XLR-FEMALE 11575,2425 r90 top (schematic designator J2)
J2_CIN7 "XLR" XLR-FEMALE 13000,2425 r90 top (schematic designator J2)
J2_CIN8 "XLR" XLR-FEMALE 14425,2425 r90 top (schematic designator J2)
J3_COUT1 "XLR" XLR-MALE 17400,2425 r270 top (schematic designator J3)
J3_COUT2 "XLR" XLR-MALE 15900,2425 r270 top (schematic designator J3)
J4_CIN1 "STEREO JACK" JACK-6.25MM 4450,3200 r90 top (schematic designator J4)
J4_CIN2 "STEREO JACK" JACK-6.25MM 5875,3200 r90 top (schematic designator J4)
J4_CIN3 "STEREO JACK" JACK-6.25MM 7300,3200 r90 top (schematic designator J4)
J4_CIN4 "STEREO JACK" JACK-6.25MM 8725,3200 r90 top (schematic designator J4)
J4_CIN5 "STEREO JACK" JACK-6.25MM 10150,3200 r90 top (schematic designator J4)
J4_CIN6 "STEREO JACK" JACK-6.25MM 11575,3200 r90 top (schematic designator J4)
J4_CIN7 "STEREO JACK" JACK-6.25MM 13000,3200 r90 top (schematic designator J4)
J4_CIN8 "STEREO JACK" JACK-6.25MM 14425,3200 r90 top (schematic designator J4)
J5 "Monitor Send" JACK-6.25MM 2371.93,2907.02 r90 top
J6 "Effects Send" JACK-6.25MM 2371.93,8354 r90 top
J7 "Headphone" JACK-6.25MM 2409.23,10944 r180 top
J8 "CON MAINS" IEC-MAINS 18015,12220 r180 top
Q1 "BC338-25" TO-92A 2550,12325 r270 top
Q2 "BC328-25" TO-92A 2550,12600 r270 top
R1 "22k" AXIAL0.4 3419,6340 r270 top
R2 "22k" AXIAL0.4 3683.45,6340 r270 top
R3_CIN1 "22k" AXIAL0.4 4650,6200 r90 top (schematic designator R3)
R3_CIN2 "22k" AXIAL0.4 6075,6200 r90 top (schematic designator R3)
R3_CIN3 "22k" AXIAL0.4 7500,6200 r90 top (schematic designator R3)
R3_CIN4 "22k" AXIAL0.4 8925,6200 r90 top (schematic designator R3)
R3_CIN5 "22k" AXIAL0.4 10350,6200 r90 top (schematic designator R3)
R3_CIN6 "22k" AXIAL0.4 11775,6200 r90 top (schematic designator R3)
R3_CIN7 "22k" AXIAL0.4 13200,6200 r90 top (schematic designator R3)
R3_CIN8 "22k" AXIAL0.4 14625,6200 r90 top (schematic designator R3)
R4_CIN1 "22k" AXIAL0.4 5100,7300 r90 top (schematic designator R4)
R4_CIN2 "22k" AXIAL0.4 6525,7300 r90 top (schematic designator R4)
R4_CIN3 "22k" AXIAL0.4 7950,7300 r90 top (schematic designator R4)
R4_CIN4 "22k" AXIAL0.4 9375,7300 r90 top (schematic designator R4)
R4_CIN5 "22k" AXIAL0.4 10800,7300 r90 top (schematic designator R4)
R4_CIN6 "22k" AXIAL0.4 12225,7300 r90 top (schematic designator R4)
R4_CIN7 "22k" AXIAL0.4 13650,7300 r90 top (schematic designator R4)
R4_CIN8 "22k" AXIAL0.4 15075,7300 r90 top (schematic designator R4)
R5_CIN1 "22k" AXIAL0.4 4525,9850 r0 top (schematic designator R5)
R5_CIN2 "22k" AXIAL0.4 5950,9850 r0 top (schematic designator R5)
R5_CIN3 "22k" AXIAL0.4 7375,9850 r0 top (schematic designator R5)
R5_CIN4 "22k" AXIAL0.4 8800,9850 r0 top (schematic designator R5)
R5_CIN5 "22k" AXIAL0.4 10225,9850 r0 top (schematic designator R5)
R5_CIN6 "22k" AXIAL0.4 11650,9850 r0 top (schematic designator R5)
R5_CIN7 "22k" AXIAL0.4 13075,9850 r0 top (schematic designator R5)
R5_CIN8 "22k" AXIAL0.4 14500,9850 r0 top (schematic designator R5)
R6_CIN1 "22k" AXIAL0.4 5100,9750 r90 top (schematic designator R6)
R6_CIN2 "22k" AXIAL0.4 6525,9750 r90 top (schematic designator R6)
R6_CIN3 "22k" AXIAL0.4 7950,9750 r90 top (schematic designator R6)
R6_CIN4 "22k" AXIAL0.4 9375,9750 r90 top (schematic designator R6)
R6_CIN5 "22k" AXIAL0.4 10800,9750 r90 top (schematic designator R6)
R6_CIN6 "22k" AXIAL0.4 12225,9750 r90 top (schematic designator R6)
R6_CIN7 "22k" AXIAL0.4 13650,9750 r90 top (schematic designator R6)
R6_CIN8 "22k" AXIAL0.4 15075,9750 r90 top (schematic designator R6)
R7 "22k" AXIAL0.4 3592.26,12104.02 r270 top
R8_COUT1 "22k" AXIAL0.4 18025,5675 r270 top (schematic designator R8)
R8_COUT2 "22k" AXIAL0.4 16525,5675 r270 top (schematic designator R8)
R9 "10R" AXIAL0.4 3551.22,5940 r90 top
R10 "10R" AXIAL0.4 3425.67,5360 r90 top
R11_CIN1 "10R" AXIAL0.4 4525,6200 r90 top (schematic designator R11)
R11_CIN2 "10R" AXIAL0.4 5950,6200 r90 top (schematic designator R11)
R11_CIN3 "10R" AXIAL0.4 7375,6200 r90 top (schematic designator R11)
R11_CIN4 "10R" AXIAL0.4 8800,6200 r90 top (schematic designator R11)
R11_CIN5 "10R" AXIAL0.4 10225,6200 r90 top (schematic designator R11)
R11_CIN6 "10R" AXIAL0.4 11650,6200 r90 top (schematic designator R11)
R11_CIN7 "10R" AXIAL0.4 13075,6200 r90 top (schematic designator R11)
R11_CIN8 "10R" AXIAL0.4 14500,6200 r90 top (schematic designator R11)
R12_CIN1 "10R" AXIAL0.4 4725,7575 r270 top (schematic designator R12)
R12_CIN2 "10R" AXIAL0.4 6150,7575 r270 top (schematic designator R12)
R12_CIN3 "10R" AXIAL0.4 7575,7575 r270 top (schematic designator R12)
R12_CIN4 "10R" AXIAL0.4 9000,7575 r270 top (schematic designator R12)
R12_CIN5 "10R" AXIAL0.4 10425,7575 r270 top (schematic designator R12)
R12_CIN6 "10R" AXIAL0.4 11850,7575 r270 top (schematic designator R12)
R12_CIN7 "10R" AXIAL0.4 13275,7575 r270 top (schematic designator R12)
R12_CIN8 "10R" AXIAL0.4 14700,7575 r270 top (schematic designator R12)
R13 "10R" AXIAL0.4 3771.93,4532.02 r180 top
R14 "10R" AXIAL0.4 3771.93,9979 r180 top
R15_COUT1 "10R" AXIAL0.4 17900,5675 r270 top (schematic designator R15)
R15_COUT2 "10R" AXIAL0.4 16400,5675 r270 top (schematic designator R15)
R16 "15k" AXIAL0.4 3299,5760 r270 top
R17 "15k" AXIAL0.4 3559,5200 r270 top
R18 "15k" AXIAL0.4 3689,4800 r90 top
R19 "15k" AXIAL0.4 3426.78,5200 r270 top
R20_CIN1 "15k" AXIAL0.4 5175,10725 r180 top (schematic designator R20)
R20_CIN2 "15k" AXIAL0.4 6600,10725 r180 top (schematic designator R20)
R20_CIN3 "15k" AXIAL0.4 8025,10725 r180 top (schematic designator R20)
R20_CIN4 "15k" AXIAL0.4 9450,10725 r180 top (schematic designator R20)
R20_CIN5 "15k" AXIAL0.4 10875,10725 r180 top (schematic designator R20)
R20_CIN6 "15k" AXIAL0.4 12300,10725 r180 top (schematic designator R20)
R20_CIN7 "15k" AXIAL0.4 13725,10725 r180 top (schematic designator R20)
R20_CIN8 "15k" AXIAL0.4 15150,10725 r180 top (schematic designator R20)
R21_CIN1 "15k" AXIAL0.4 5175,10875 r180 top (schematic designator R21)
R21_CIN2 "15k" AXIAL0.4 6600,10875 r180 top (schematic designator R21)
R21_CIN3 "15k" AXIAL0.4 8025,10875 r180 top (schematic designator R21)
R21_CIN4 "15k" AXIAL0.4 9450,10875 r180 top (schematic designator R21)
R21_CIN5 "15k" AXIAL0.4 10875,10875 r180 top (schematic designator R21)
R21_CIN6 "15k" AXIAL0.4 12300,10875 r180 top (schematic designator R21)
R21_CIN7 "15k" AXIAL0.4 13725,10875 r180 top (schematic designator R21)
R21_CIN8 "15k" AXIAL0.4 15150,10875 r180 top (schematic designator R21)
R22_CIN1 "15k" AXIAL0.4 5175,11825 r180 top (schematic designator R22)
R22_CIN2 "15k" AXIAL0.4 6600,11825 r180 top (schematic designator R22)
R22_CIN3 "15k" AXIAL0.4 8025,11825 r180 top (schematic designator R22)
R22_CIN4 "15k" AXIAL0.4 9450,11825 r180 top (schematic designator R22)
R22_CIN5 "15k" AXIAL0.4 10875,11825 r180 top (schematic designator R22)
R22_CIN6 "15k" AXIAL0.4 12300,11825 r180 top (schematic designator R22)
R22_CIN7 "15k" AXIAL0.4 13725,11825 r180 top (schematic designator R22)
R22_CIN8 "15k" AXIAL0.4 15150,11825 r180 top (schematic designator R22)
R23_CIN1 "15k" AXIAL0.4 5175,11975 r180 top (schematic designator R23)
R23_CIN2 "15k" AXIAL0.4 6600,11975 r180 top (schematic designator R23)
R23_CIN3 "15k" AXIAL0.4 8025,11975 r180 top (schematic designator R23)
R23_CIN4 "15k" AXIAL0.4 9450,11975 r180 top (schematic designator R23)
R23_CIN5 "15k" AXIAL0.4 10875,11975 r180 top (schematic designator R23)
R23_CIN6 "15k" AXIAL0.4 12300,11975 r180 top (schematic designator R23)
R23_CIN7 "15k" AXIAL0.4 13725,11975 r180 top (schematic designator R23)
R23_CIN8 "15k" AXIAL0.4 15150,11975 r180 top (schematic designator R23)
R24 "2.2k" AXIAL0.4 3547.89,5760 r270 top
R25_CIN1 "2.2k" AXIAL0.4 4950,2250 r90 top (schematic designator R25)
R25_CIN2 "2.2k" AXIAL0.4 6375,2250 r90 top (schematic designator R25)
R25_CIN3 "2.2k" AXIAL0.4 7800,2250 r90 top (schematic designator R25)
R25_CIN4 "2.2k" AXIAL0.4 9225,2250 r90 top (schematic designator R25)
R25_CIN5 "2.2k" AXIAL0.4 10650,2250 r90 top (schematic designator R25)
R25_CIN6 "2.2k" AXIAL0.4 12075,2250 r90 top (schematic designator R25)
R25_CIN7 "2.2k" AXIAL0.4 13500,2250 r90 top (schematic designator R25)
R25_CIN8 "2.2k" AXIAL0.4 14925,2250 r90 top (schematic designator R25)
R26_CIN1 "2.2k" AXIAL0.4 5075,2250 r90 top (schematic designator R26)
R26_CIN2 "2.2k" AXIAL0.4 6500,2250 r90 top (schematic designator R26)
R26_CIN3 "2.2k" AXIAL0.4 7925,2250 r90 top (schematic designator R26)
R26_CIN4 "2.2k" AXIAL0.4 9350,2250 r90 top (schematic designator R26)
R26_CIN5 "2.2k" AXIAL0.4 10775,2250 r90 top (schematic designator R26)
R26_CIN6 "2.2k" AXIAL0.4 12200,2250 r90 top (schematic designator R26)
R26_CIN7 "2.2k" AXIAL0.4 13625,2250 r90 top (schematic designator R26)
R26_CIN8 "2.2k" AXIAL0.4 15050,2250 r90 top (schematic designator R26)
R27_CIN1 "2.2k" AXIAL0.4 4400,6200 r90 top (schematic designator R27)
R27_CIN2 "2.2k" AXIAL0.4 5825,6200 r90 top (schematic designator R27)
R27_CIN3 "2.2k" AXIAL0.4 7250,6200 r90 top (schematic designator R27)
R27_CIN4 "2.2k" AXIAL0.4 8675,6200 r90 top (schematic designator R27)
R27_CIN5 "2.2k" AXIAL0.4 10100,6200 r90 top (schematic designator R27)
R27_CIN6 "2.2k" AXIAL0.4 11525,6200 r90 top (schematic designator R27)
R27_CIN7 "2.2k" AXIAL0.4 12950,6200 r90 top (schematic designator R27)
R27_CIN8 "2.2k" AXIAL0.4 14375,6200 r90 top (schematic designator R27)
R28_CIN1 "2.2k" AXIAL0.4 4600,7175 r90 top (schematic designator R28)
R28_CIN2 "2.2k" AXIAL0.4 6025,7175 r90 top (schematic designator R28)
R28_CIN3 "2.2k" AXIAL0.4 7450,7175 r90 top (schematic designator R28)
R28_CIN4 "2.2k" AXIAL0.4 8875,7175 r90 top (schematic designator R28)
R28_CIN5 "2.2k" AXIAL0.4 10300,7175 r90 top (schematic designator R28)
R28_CIN6 "2.2k" AXIAL0.4 11725,7175 r90 top (schematic designator R28)
R28_CIN7 "2.2k" AXIAL0.4 13150,7175 r90 top (schematic designator R28)
R28_CIN8 "2.2k" AXIAL0.4 14575,7175 r90 top (schematic designator R28)
R29 "2.2k" AXIAL0.4 3121.93,4252.02 r270 top
R30 "2.2k" AXIAL0.4 3371.93,4312.02 r0 top
R31 "2.2k" AXIAL0.4 3771.93,4412.02 r180 top
R32 "2.2k" AXIAL0.4 3271.93,4402.02 r180 top
R33 "2.2k" AXIAL0.4 3121.93,9699 r270 top
R34 "2.2k" AXIAL0.4 3371.93,9759 r0 top
R35 "2.2k" AXIAL0.4 3771.93,9859 r180 top
R36 "2.2k" AXIAL0.4 3271.93,9849 r180 top
R37_COUT1 "2.2k" AXIAL0.4 17150,6750 r0 top (schematic designator R37)
R37_COUT2 "2.2k" AXIAL0.4 15650,6750 r0 top (schematic designator R37)
R38_COUT1 "2.2k" AXIAL0.4 17725,5450 r270 top (schematic designator R38)
R38_COUT2 "2.2k" AXIAL0.4 16225,5450 r270 top (schematic designator R38)
R39 "6.8k" AXIAL0.4 3680.11,5360 r90 top
R40_CIN1 "6.8k" AXIAL0.4 4275,6200 r90 top (schematic designator R40)
R40_CIN2 "6.8k" AXIAL0.4 5700,6200 r90 top (schematic designator R40)
R40_CIN3 "6.8k" AXIAL0.4 7125,6200 r90 top (schematic designator R40)
R40_CIN4 "6.8k" AXIAL0.4 8550,6200 r90 top (schematic designator R40)
R40_CIN5 "6.8k" AXIAL0.4 9975,6200 r90 top (schematic designator R40)
R40_CIN6 "6.8k" AXIAL0.4 11400,6200 r90 top (schematic designator R40)
R40_CIN7 "6.8k" AXIAL0.4 12825,6200 r90 top (schematic designator R40)
R40_CIN8 "6.8k" AXIAL0.4 14250,6200 r90 top (schematic designator R40)
R41_CIN1 "6.8k" AXIAL0.4 4300,7575 r270 top (schematic designator R41)
R41_CIN2 "6.8k" AXIAL0.4 5725,7575 r270 top (schematic designator R41)
R41_CIN3 "6.8k" AXIAL0.4 7150,7575 r270 top (schematic designator R41)
R41_CIN4 "6.8k" AXIAL0.4 8575,7575 r270 top (schematic designator R41)
R41_CIN5 "6.8k" AXIAL0.4 10000,7575 r270 top (schematic designator R41)
R41_CIN6 "6.8k" AXIAL0.4 11425,7575 r270 top (schematic designator R41)
R41_CIN7 "6.8k" AXIAL0.4 12850,7575 r270 top (schematic designator R41)
R41_CIN8 "6.8k" AXIAL0.4 14275,7575 r270 top (schematic designator R41)
R42_COUT1 "6.8k" AXIAL0.4 17425,5050 r90 top (schematic designator R42)
R42_COUT2 "6.8k" AXIAL0.4 15925,5050 r90 top (schematic designator R42)
R43_CIN1 "330R" AXIAL0.4 4025,3500 r270 top (schematic designator R43)
R43_CIN2 "330R" AXIAL0.4 5450,3500 r270 top (schematic designator R43)
R43_CIN3 "330R" AXIAL0.4 6875,3500 r270 top (schematic designator R43)
R43_CIN4 "330R" AXIAL0.4 8300,3500 r270 top (schematic designator R43)
R43_CIN5 "330R" AXIAL0.4 9725,3500 r270 top (schematic designator R43)
R43_CIN6 "330R" AXIAL0.4 11150,3500 r270 top (schematic designator R43)
R43_CIN7 "330R" AXIAL0.4 12575,3500 r270 top (schematic designator R43)
R43_CIN8 "330R" AXIAL0.4 14000,3500 r270 top (schematic designator R43)
R44_COUT1 "330R" AXIAL0.4 17050,4600 r270 top (schematic designator R44)
R44_COUT2 "330R" AXIAL0.4 15550,4600 r270 top (schematic designator R44)
R45_CIN1 "4.7k" AXIAL0.4 3900,3500 r270 top (schematic designator R45)
R45_CIN2 "4.7k" AXIAL0.4 5325,3500 r270 top (schematic designator R45)
R45_CIN3 "4.7k" AXIAL0.4 6750,3500 r270 top (schematic designator R45)
R45_CIN4 "4.7k" AXIAL0.4 8175,3500 r270 top (schematic designator R45)
R45_CIN5 "4.7k" AXIAL0.4 9600,3500 r270 top (schematic designator R45)
R45_CIN6 "4.7k" AXIAL0.4 11025,3500 r270 top (schematic designator R45)
R45_CIN7 "4.7k" AXIAL0.4 12450,3500 r270 top (schematic designator R45)
R45_CIN8 "4.7k" AXIAL0.4 13875,3500 r270 top (schematic designator R45)
R46_CIN1 "4.7k" AXIAL0.4 5100,8900 r270 top (schematic designator R46)
R46_CIN2 "4.7k" AXIAL0.4 6525,8900 r270 top (schematic designator R46)
R46_CIN3 "4.7k" AXIAL0.4 7950,8900 r270 top (schematic designator R46)
R46_CIN4 "4.7k" AXIAL0.4 9375,8900 r270 top (schematic designator R46)
R46_CIN5 "4.7k" AXIAL0.4 10800,8900 r270 top (schematic designator R46)
R46_CIN6 "4.7k" AXIAL0.4 12225,8900 r270 top (schematic designator R46)
R46_CIN7 "4.7k" AXIAL0.4 13650,8900 r270 top (schematic designator R46)
R46_CIN8 "4.7k" AXIAL0.4 15075,8900 r270 top (schematic designator R46)
R47_CIN1 "4.7k" AXIAL0.4 4375,9850 r180 top (schematic designator R47)
R47_CIN2 "4.7k" AXIAL0.4 5800,9850 r180 top (schematic designator R47)
R47_CIN3 "4.7k" AXIAL0.4 7225,9850 r180 top (schematic designator R47)
R47_CIN4 "4.7k" AXIAL0.4 8650,9850 r180 top (schematic designator R47)
R47_CIN5 "4.7k" AXIAL0.4 10075,9850 r180 top (schematic designator R47)
R47_CIN6 "4.7k" AXIAL0.4 11500,9850 r180 top (schematic designator R47)
R47_CIN7 "4.7k" AXIAL0.4 12925,9850 r180 top (schematic designator R47)
R47_CIN8 "4.7k" AXIAL0.4 14350,9850 r180 top (schematic designator R47)
R48_CIN1 "10k" AXIAL0.4 4950,2800 r90 top (schematic designator R48)
R48_CIN2 "10k" AXIAL0.4 6375,2800 r90 top (schematic designator R48)
R48_CIN3 "10k" AXIAL0.4 7800,2800 r90 top (schematic designator R48)
R48_CIN4 "10k" AXIAL0.4 9225,2800 r90 top (schematic designator R48)
R48_CIN5 "10k" AXIAL0.4 10650,2800 r90 top (schematic designator R48)
R48_CIN6 "10k" AXIAL0.4 12075,2800 r90 top (schematic designator R48)
R48_CIN7 "10k" AXIAL0.4 13500,2800 r90 top (schematic designator R48)
R48_CIN8 "10k" AXIAL0.4 14925,2800 r90 top (schematic designator R48)
R49_CIN1 "10k" AXIAL0.4 5075,2800 r90 top (schematic designator R49)
R49_CIN2 "10k" AXIAL0.4 6500,2800 r90 top (schematic designator R49)
R49_CIN3 "10k" AXIAL0.4 7925,2800 r90 top (schematic designator R49)
R49_CIN4 "10k" AXIAL0.4 9350,2800 r90 top (schematic designator R49)
R49_CIN5 "10k" AXIAL0.4 10775,2800 r90 top (schematic designator R49)
R49_CIN6 "10k" AXIAL0.4 12200,2800 r90 top (schematic designator R49)
R49_CIN7 "10k" AXIAL0.4 13625,2800 r90 top (schematic designator R49)
R49_CIN8 "10k" AXIAL0.4 15050,2800 r90 top (schematic designator R49)
R50_CIN1 "10k" AXIAL0.4 4175,7175 r90 top (schematic designator R50)
R50_CIN2 "10k" AXIAL0.4 5600,7175 r90 top (schematic designator R50)
R50_CIN3 "10k" AXIAL0.4 7025,7175 r90 top (schematic designator R50)
R50_CIN4 "10k" AXIAL0.4 8450,7175 r90 top (schematic designator R50)
R50_CIN5 "10k" AXIAL0.4 9875,7175 r90 top (schematic designator R50)
R50_CIN6 "10k" AXIAL0.4 11300,7175 r90 top (schematic designator R50)
R50_CIN7 "10k" AXIAL0.4 12725,7175 r90 top (schematic designator R50)
R50_CIN8 "10k" AXIAL0.4 14150,7175 r90 top (schematic designator R50)
R51_CIN1 "10k" AXIAL0.4 5175,12925 r180 top (schematic designator R51)
R51_CIN2 "10k" AXIAL0.4 6600,12925 r180 top (schematic designator R51)
R51_CIN3 "10k" AXIAL0.4 8025,12925 r180 top (schematic designator R51)
R51_CIN4 "10k" AXIAL0.4 9450,12925 r180 top (schematic designator R51)
R51_CIN5 "10k" AXIAL0.4 10875,12925 r180 top (schematic designator R51)
R51_CIN6 "10k" AXIAL0.4 12300,12925 r180 top (schematic designator R51)
R51_CIN7 "10k" AXIAL0.4 13725,12925 r180 top (schematic designator R51)
R51_CIN8 "10k" AXIAL0.4 15150,12925 r180 top (schematic designator R51)
R52 "10k" AXIAL0.4 3726.02,12104.02 r270 top
R53 "10k" AXIAL0.4 3057.25,12104.02 r270 top
R54 "10k" AXIAL0.4 2923.49,12104.02 r270 top
R55_COUT1 "10k" AXIAL0.4 17900,5125 r270 top (schematic designator R55)
R55_COUT2 "10k" AXIAL0.4 16400,5125 r270 top (schematic designator R55)
R56_COUT1 "10k" AXIAL0.4 17775,4350 r180 top (schematic designator R56)
R56_COUT2 "10k" AXIAL0.4 16275,4350 r180 top (schematic designator R56)
R57 "68k" AXIAL0.4 3241.93,4252.02 r270 top
R58 "68k" AXIAL0.4 3241.93,9699 r270 top
R59 "68k" AXIAL0.4 3458.51,12104.02 r270 top
R60_COUT1 "68k" AXIAL0.4 17550,6625 r180 top (schematic designator R60)
R60_COUT2 "68k" AXIAL0.4 16050,6625 r180 top (schematic designator R60)
R61 "100R" AXIAL0.4 2871.93,4522.02 r0 top
R62 "100R" AXIAL0.4 2871.93,9969 r0 top
R63_COUT1 "100R" AXIAL0.4 17300,5450 r270 top (schematic designator R63)
R63_COUT2 "100R" AXIAL0.4 15800,5450 r270 top (schematic designator R63)
R64_COUT1 "100R" AXIAL0.4 18025,5125 r270 top (schematic designator R64)
R64_COUT2 "100R" AXIAL0.4 16525,5125 r270 top (schematic designator R64)
R65_COUT1 "100R" AXIAL0.4 17375,4225 r0 top (schematic designator R65)
R65_COUT2 "100R" AXIAL0.4 15875,4225 r0 top (schematic designator R65)
R66 "33R" AXIAL0.4 2789.74,12104.02 r270 top
R67 "33R" AXIAL0.4 2655.99,12104.02 r270 top
R68 "68R" AXIAL0.4 2522.23,12104.02 r270 top
R69_COUT1 "270R 1W" AXIAL0.4 16875,3675 r270 top (schematic designator R69)
R69_COUT2 "270R 1W" AXIAL0.4 15375,3675 r270 top (schematic designator R69)
R70_COUT1 "680R" AXIAL0.4 16925,4600 r270 top (schematic designator R70)
R70_COUT2 "680R" AXIAL0.4 15425,4600 r270 top (schematic designator R70)
S1_CIN1 "SW SPDT" SW-SPDT 3975,2950 r270 top (schematic designator S1)
S1_CIN2 "SW SPDT" SW-SPDT 5400,2950 r270 top (schematic designator S1)
S1_CIN3 "SW SPDT" SW-SPDT 6825,2950 r270 top (schematic designator S1)
S1_CIN4 "SW SPDT" SW-SPDT 8250,2950 r270 top (schematic designator S1)
S1_CIN5 "SW SPDT" SW-SPDT 9675,2950 r270 top (schematic designator S1)
S1_CIN6 "SW SPDT" SW-SPDT 11100,2950 r270 top (schematic designator S1)
S1_CIN7 "SW SPDT" SW-SPDT 12525,2950 r270 top (schematic designator S1)
S1_CIN8 "SW SPDT" SW-SPDT 13950,2950 r270 top (schematic designator S1)
S2 "SW-12WAY" SW-12WAY 3280,11135 r180 top
S3 "Power" SW-MAINS 15380,12730 r0 top
T1 "30V CT" TRANSFORMER 16765,9790 r270 top
U1 "LM833M" DIP8 3389,6780 r0 top
U2_CIN1 "LM833M" DIP8 4350,6725 r90 top (schematic designator U2)
U2_CIN2 "LM833M" DIP8 5775,6725 r90 top (schematic designator U2)
U2_CIN3 "LM833M" DIP8 7200,6725 r90 top (schematic designator U2)
U2_CIN4 "LM833M" DIP8 8625,6725 r90 top (schematic designator U2)
U2_CIN5 "LM833M" DIP8 10050,6725 r90 top (schematic designator U2)
U2_CIN6 "LM833M" DIP8 11475,6725 r90 top (schematic designator U2)
U2_CIN7 "LM833M" DIP8 12900,6725 r90 top (schematic designator U2)
U2_CIN8 "LM833M" DIP8 14325,6725 r90 top (schematic designator U2)
U3 "LM833M" DIP8 3461.93,9639 r0 top
U4_COUT1 "LM833M" DIP8 17300,6850 r90 top (schematic designator U4)
U4_COUT2 "LM833M" DIP8 15800,6850 r90 top (schematic designator U4)
U5_COUT1 "LM833M" DIP8 17300,4650 r90 top (schematic designator U5)
U5_COUT2 "LM833M" DIP8 15800,4650 r90 top (schematic designator U5)
U6_CIN1 "SSM2017P (8)" DIP8 4350,3600 r90 top (schematic designator U6)
U6_CIN2 "SSM2017P (8)" DIP8 5775,3600 r90 top (schematic designator U6)
U6_CIN3 "SSM2017P (8)" DIP8 7200,3600 r90 top (schematic designator U6)
U6_CIN4 "SSM2017P (8)" DIP8 8625,3600 r90 top (schematic designator U6)
U6_CIN5 "SSM2017P (8)" DIP8 10050,3600 r90 top (schematic designator U6)
U6_CIN6 "SSM2017P (8)" DIP8 11475,3600 r90 top (schematic designator U6)
U6_CIN7 "SSM2017P (8)" DIP8 12900,3600 r90 top (schematic designator U6)
U6_CIN8 "SSM2017P (8)" DIP8 14325,3600 r90 top (schematic designator U6)
U7_CIN1 "OP27C" DIP8 4350,10250 r90 top (schematic designator U7)
U7_CIN2 "OP27C" DIP8 5775,10250 r90 top (schematic designator U7)
U7_CIN3 "OP27C" DIP8 7200,10250 r90 top (schematic designator U7)
U7_CIN4 "OP27C" DIP8 8625,10250 r90 top (schematic designator U7)
U7_CIN5 "OP27C" DIP8 10050,10250 r90 top (schematic designator U7)
U7_CIN6 "OP27C" DIP8 11475,10250 r90 top (schematic designator U7)
U7_CIN7 "OP27C" DIP8 12900,10250 r90 top (schematic designator U7)
U7_CIN8 "OP27C" DIP8 14325,10250 r90 top (schematic designator U7)
U8 "LM833M" DIP8 3461.93,4192.02 r0 top
U9 "TL071" DIP8 3715,12564.04 r270 top
U10 "78L15" TO-92A 15960,10760 r0 top
U11 "79L15" TO-92A 15500,10760 r0 top
U12_COUT1 "LM3915N(18)" DIP18 18075,4050 r270 top (schematic designator U12)
U12_COUT2 "LM3915N(18)" DIP18 16575,4050 r270 top (schematic designator U12)
VR1 "10k LOG" "POT - 24MM" 2550,6225 r90 top
VR2_CIN1 "10k LOG" "POT - 24MM" 4450,5600 r90 top (schematic designator VR2)
VR2_CIN2 "10k LOG" "POT - 24MM" 5875,5600 r90 top (schematic designator VR2)
VR2_CIN3 "10k LOG" "POT - 24MM" 7300,5600 r90 top (schematic designator VR2)
VR2_CIN4 "10k LOG" "POT - 24MM" 8725,5600 r90 top (schematic designator VR2)
VR2_CIN5 "10k LOG" "POT - 24MM" 10150,5600 r90 top (schematic designator VR2)
VR2_CIN6 "10k LOG" "POT - 24MM" 11575,5600 r90 top (schematic designator VR2)
VR2_CIN7 "10k LOG" "POT - 24MM" 13000,5600 r90 top (schematic designator VR2)
VR2_CIN8 "10k LOG" "POT - 24MM" 14425,5600 r90 top (schematic designator VR2)
VR3_CIN1 "10k LOG" "POT - 24MM" 4450,4500 r90 top (schematic designator VR3)
VR3_CIN2 "10k LOG" "POT - 24MM" 5875,4500 r90 top (schematic designator VR3)
VR3_CIN3 "10k LOG" "POT - 24MM" 7300,4500 r90 top (schematic designator VR3)
VR3_CIN4 "10k LOG" "POT - 24MM" 8725,4500 r90 top (schematic designator VR3)
VR3_CIN5 "10k LOG" "POT - 24MM" 10150,4500 r90 top (schematic designator VR3)
VR3_CIN6 "10k LOG" "POT - 24MM" 11575,4500 r90 top (schematic designator VR3)
VR3_CIN7 "10k LOG" "POT - 24MM" 13000,4500 r90 top (schematic designator VR3)
VR3_CIN8 "10k LOG" "POT - 24MM" 14425,4500 r90 top (schematic designator VR3)
VR4_CIN1 "10K LOG" "POT - 24MM" 4450,12450 r90 top (schematic designator VR4)
VR4_CIN2 "10K LOG" "POT - 24MM" 5875,12450 r90 top (schematic designator VR4)
VR4_CIN3 "10K LOG" "POT - 24MM" 7300,12450 r90 top (schematic designator VR4)
VR4_CIN4 "10K LOG" "POT - 24MM" 8725,12450 r90 top (schematic designator VR4)
VR4_CIN5 "10K LOG" "POT - 24MM" 10150,12450 r90 top (schematic designator VR4)
VR4_CIN6 "10K LOG" "POT - 24MM" 11575,12450 r90 top (schematic designator VR4)
VR4_CIN7 "10K LOG" "POT - 24MM" 13000,12450 r90 top (schematic designator VR4)
VR4_CIN8 "10K LOG" "POT - 24MM" 14425,12450 r90 top (schematic designator VR4)
VR5 "10k LOG" "POT - 24MM" 3300,3100 r180 top
VR6 "10k LOG" "POT - 24MM" 3300,8550 r180 top
VR7_COUT1 "10k LOG" "POT - 24MM" 17400,6025 r90 top (schematic designator VR7)
VR7_COUT2 "10k LOG" "POT - 24MM" 15900,6025 r90 top (schematic designator VR7)
VR8 "10K LIN" "POT - 24MM" 2550,5175 r90 top
VR9_CIN1 "10K LIN" "POT - 24MM" 4450,11350 r90 top (schematic designator VR9)
VR9_CIN2 "10K LIN" "POT - 24MM" 5875,11350 r90 top (schematic designator VR9)
VR9_CIN3 "10K LIN" "POT - 24MM" 7300,11350 r90 top (schematic designator VR9)
VR9_CIN4 "10K LIN" "POT - 24MM" 8725,11350 r90 top (schematic designator VR9)
VR9_CIN5 "10K LIN" "POT - 24MM" 10150,11350 r90 top (schematic designator VR9)
VR9_CIN6 "10K LIN" "POT - 24MM" 11575,11350 r90 top (schematic designator VR9)
VR9_CIN7 "10K LIN" "POT - 24MM" 13000,11350 r90 top (schematic designator VR9)
VR9_CIN8 "10K LIN" "POT - 24MM" 14425,11350 r90 top (schematic designator VR9)
VR10_CIN1 "100K LIN" "POT - 24MM" 4450,8150 r90 top (schematic designator VR10)
VR10_CIN2 "100K LIN" "POT - 24MM" 5875,8150 r90 top (schematic designator VR10)
VR10_CIN3 "100K LIN" "POT - 24MM" 7300,8150 r90 top (schematic designator VR10)
VR10_CIN4 "100K LIN" "POT - 24MM" 8725,8150 r90 top (schematic designator VR10)
VR10_CIN5 "100K LIN" "POT - 24MM" 10150,8150 r90 top (schematic designator VR10)
VR10_CIN6 "100K LIN" "POT - 24MM" 11575,8150 r90 top (schematic designator VR10)
VR10_CIN7 "100K LIN" "POT - 24MM" 13000,8150 r90 top (schematic designator VR10)
VR10_CIN8 "100K LIN" "POT - 24MM" 14425,8150 r90 top (schematic designator VR10)
VR11_CIN1 "20K LIN" "POT - 24MM" 4450,9250 r90 top (schematic designator VR11)
VR11_CIN2 "20K LIN" "POT - 24MM" 5875,9250 r90 top (schematic designator VR11)
VR11_CIN3 "20K LIN" "POT - 24MM" 7300,9250 r90 top (schematic designator VR11)
VR11_CIN4 "20K LIN" "POT - 24MM" 8725,9250 r90 top (schematic designator VR11)
VR11_CIN5 "20K LIN" "POT - 24MM" 10150,9250 r90 top (schematic designator VR11)
VR11_CIN6 "20K LIN" "POT - 24MM" 11575,9250 r90 top (schematic designator VR11)
VR11_CIN7 "20K LIN" "POT - 24MM" 13000,9250 r90 top (schematic designator VR11)
VR11_CIN8 "20K LIN" "POT - 24MM" 14425,9250 r90 top (schematic designator VR11)

## Footprints (in the part's own frame and the unit in brackets; to place one, negate y for a bottom-side part, rotate by r counter-clockwise, add the part's x,y. Pads: shape width x height; smd on the part's side, far side on the other; paste and mask are expansions set on the pad)
AXIAL0.4 [mil]
  round 62 hole 32: 1(0,0) 2(400,0)
  silkscreen extent 40,-40 360,40
DIODE0.4 [mil]
  round 62 hole 32: 1(0,0) 2(400,0)
  silkscreen extent 40,-40 360,40
DIODE0.5 [mil]
  round 70 hole 40: 1(0,0) 2(500,0)
  silkscreen extent 60,-55 440,55
DIP8 [mil]
  rect 50x50 hole 32: 1(0,0)
  round 50 hole 32: 2(0,-100) 3(0,-200) 4(0,-300) 5(300,-300) 6(300,-200) 7(300,-100) 8(300,0)
  silkscreen extent 50,-350 250,50
DIP18 [mil]
  rect 50x50 hole 32: 1(0,0)
  round 50 hole 32: 2(0,-100) 3(0,-200) 4(0,-300) 5(0,-400) 6(0,-500) 7(0,-600) 8(0,-700) 9(0,-800) 10(300,-800) 11(300,-700) 12(300,-600) 13(300,-500) 14(300,-400) 15(300,-300) 16(300,-200) 17(300,-100) 18(300,0)
  silkscreen extent 50,-850 250,50
FUSE [mil]
  rect 150x150 hole 30: 1(0,0) 1(200,0) 2(1000,0) 2(1200,0)
  TopLayer region: 1150,75 1050,75 1050,-75 1150,-75
  TopLayer region: 150,75 50,75 50,-75 150,-75
  silkscreen extent -100,-100 1300,100
IEC-MAINS [mil]
  rect 120x120 hole 80: 1(0,0)
  round 120 hole 80: 2(500,0) 3(1000,0)
  silkscreen extent -250,-250 1250,1750
JACK-6.25MM [mil]
  round 60 hole 39: 0(-251,94) 0(94,-251)
  round 100 hole 78: 1(251,-22) 2(-22,251) 3(-184,-184)
  silkscreen extent -315,-315 315,315
"LED - 10 BAR HORIZONTAL" [mil]
  rect 50x50 hole 32: 1(0,0)
  round 50 hole 32: 2(300,0) 3(0,100) 4(300,100) 5(0,200) 6(300,200) 7(0,300) 8(300,300) 9(0,400) 10(300,400) 11(0,500) 12(300,500) 13(0,600) 14(300,600) 15(0,700) 16(300,700) 17(0,800) 18(300,800) 19(0,900) 20(300,900)
  silkscreen extent -50,-50 350,950
"POT - 24MM" [mil]
  round 62 hole 35: 1(-200,-600) 2(0,-600) 3(200,-600)
  round 50 hole 236.22 unplated: MNT(0,0)
  KeepOutLayer circle w10: c0,0 r210
  silkscreen extent -500,-670 500,500
RAD0.2 [mil]
  round 62 hole 28: 1(0,0) 2(200,0)
  silkscreen extent -75,-75 275,75
RAD0.8 [mil]
  round 70 hole 40: 1(0,0) 2(800,0)
  silkscreen extent -75,-125 875,125
RB.2/.4 [mil]
  round 62 hole 28: 1(0,0) 2(-200,0)
  silkscreen extent -300,-200 200,200
RB.2/.4-NP [mil]
  round 62 hole 28: 1(0,0) 2(-200,0)
  silkscreen extent -300,-200 100,200